# EAGLE board BRD (EAGLE 9.7.0)
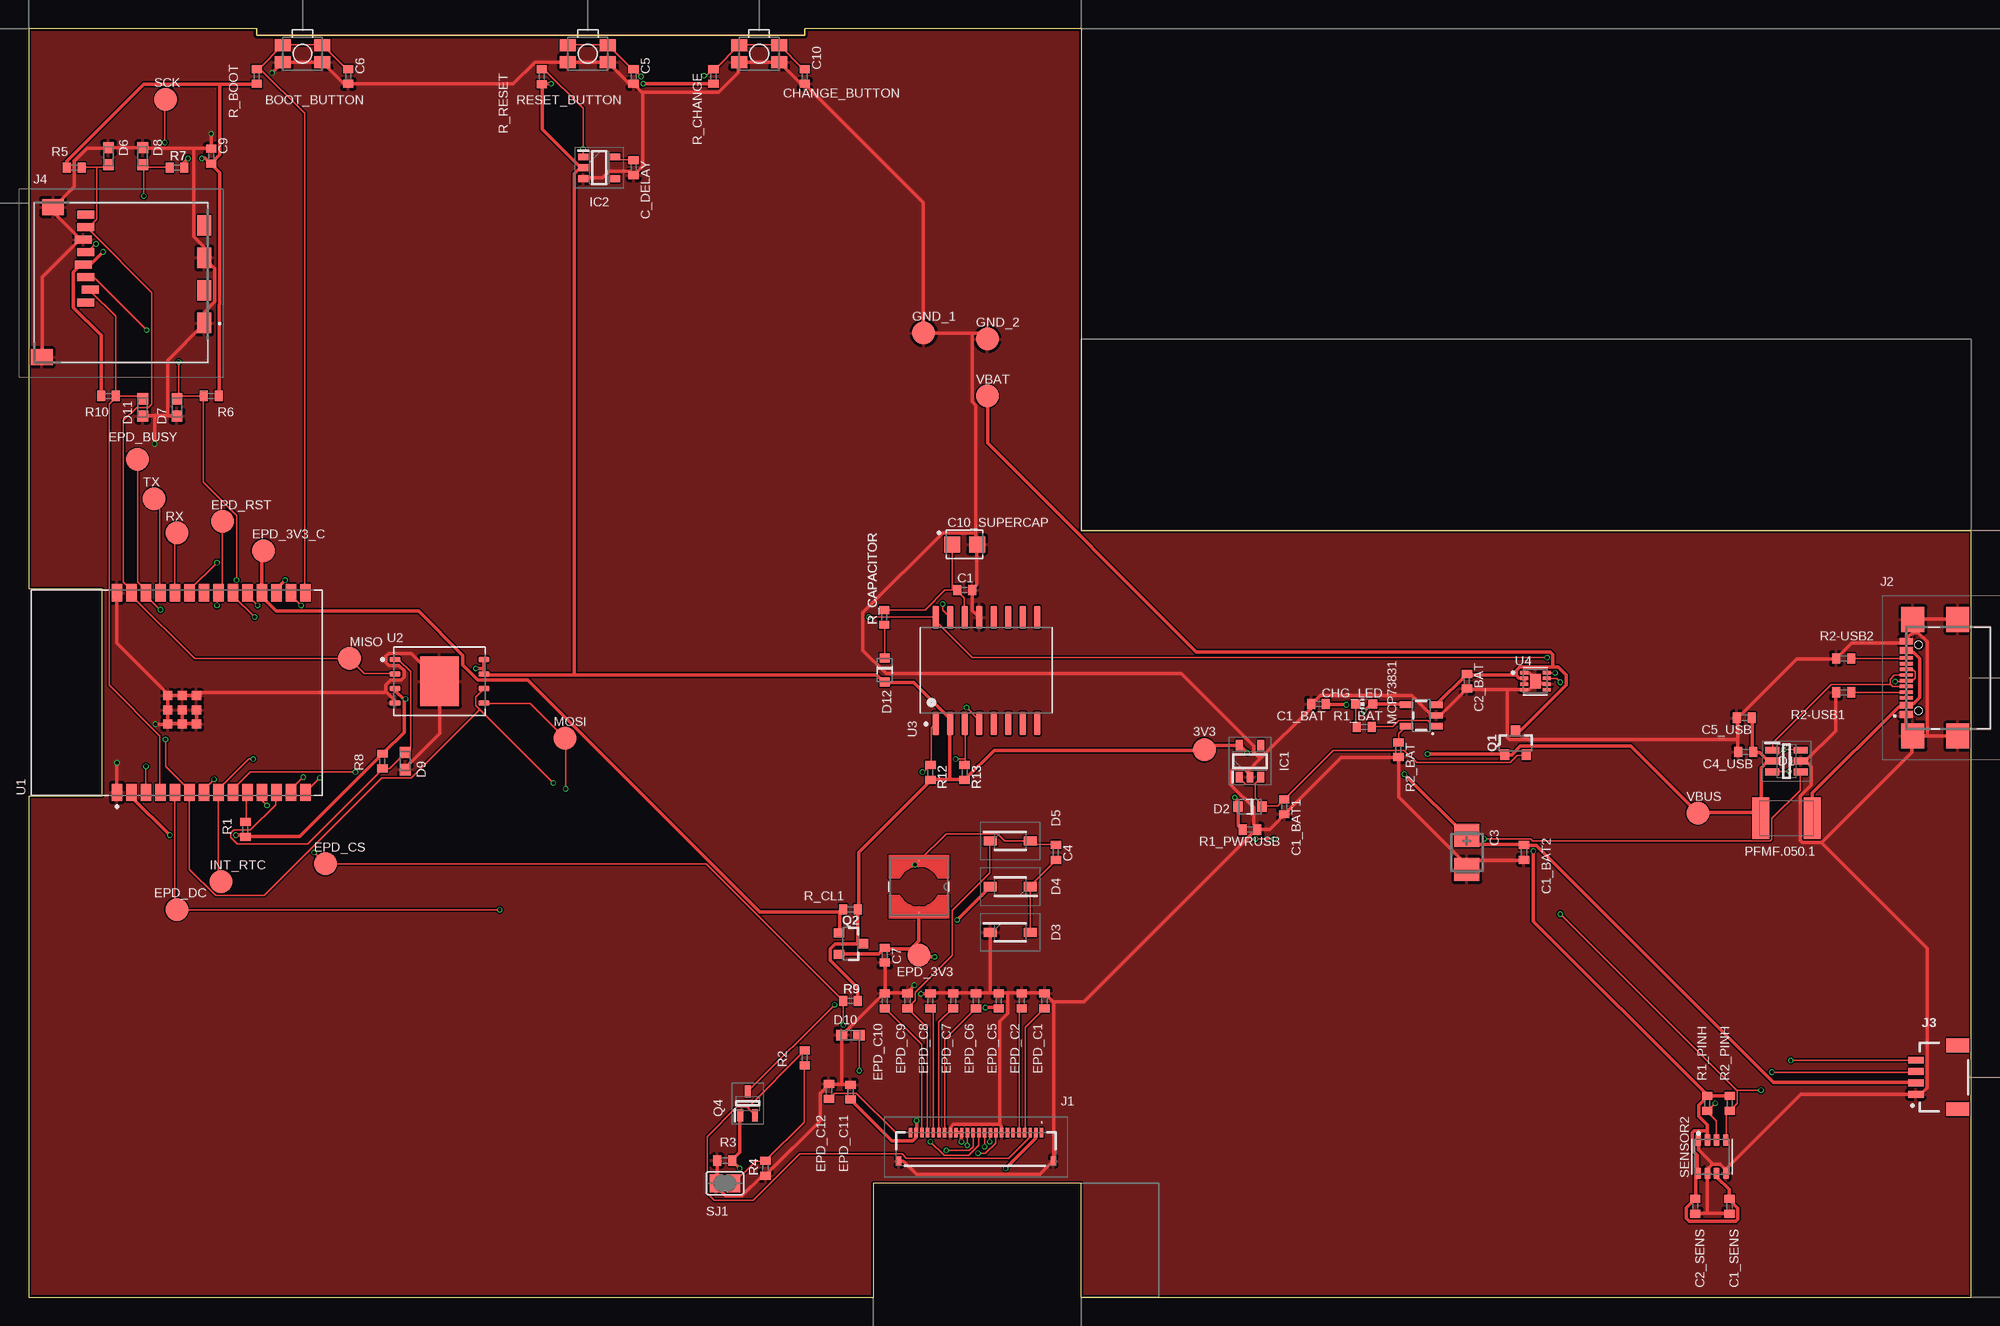
[diagram p0: board, top side]
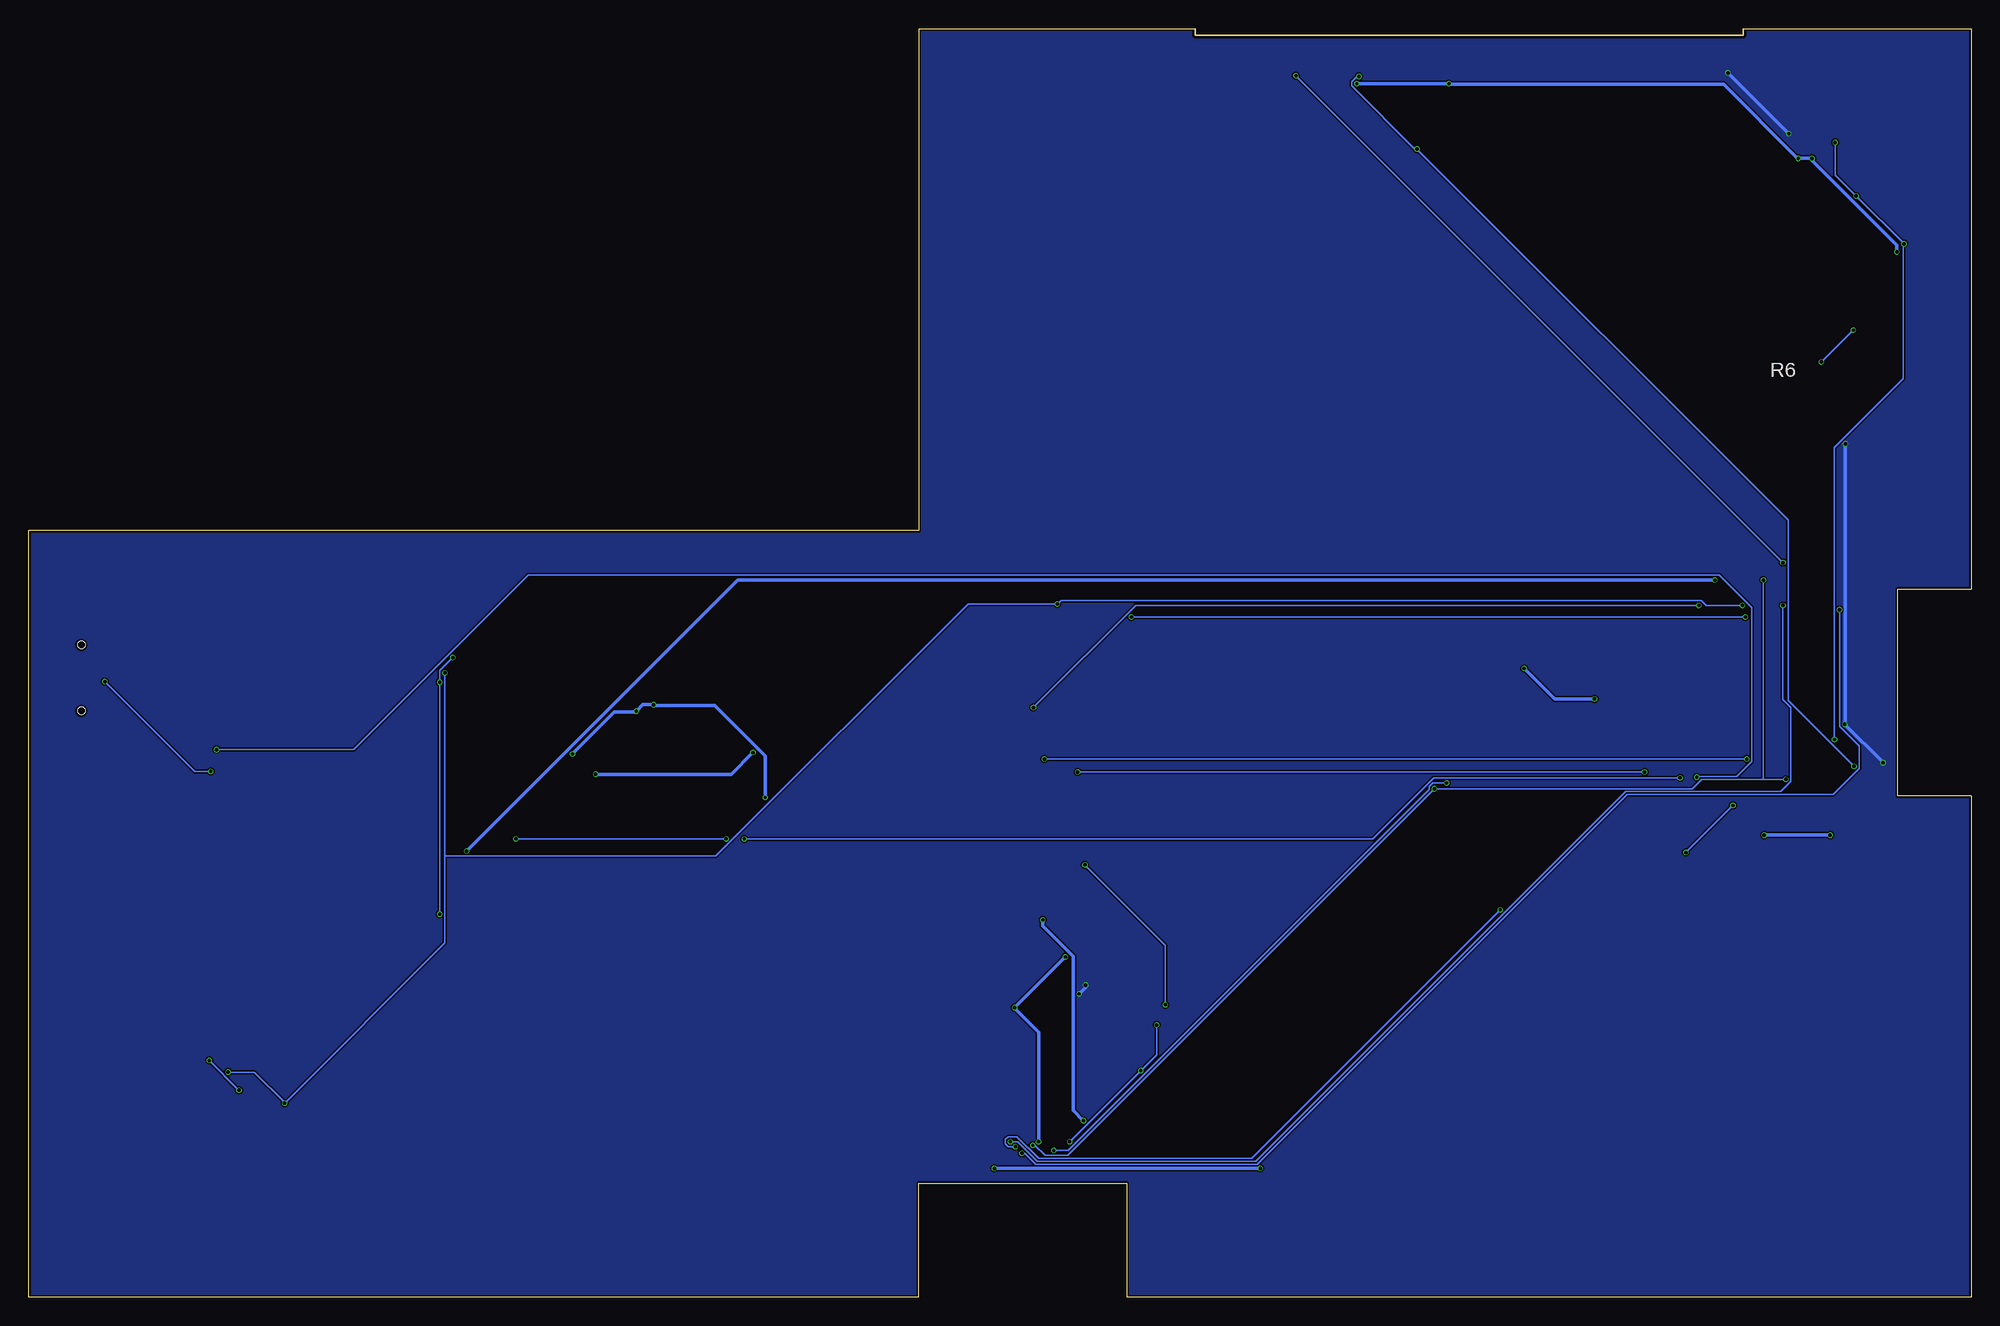
[diagram p1: board, bottom side, seen from below]

Size 170.2 x 111.2 mm. Coordinates in mm from the lower left corner, seen from the top.
Outline: 0,0 74,0 74,10 92.2,10 92.2,0 170.2,0 170.2,67.2 92.2,67.2 92.2,111.2 68.01,111.2 68.01,110.6 19.99,110.6 19.99,111.2 0,111.2 0,62.08 6.46,62.08 6.46,43.94 0,43.94 0,0
Copper layers (1*16): Top 0.035mm / dielectric 1.6mm / Bottom 0.035mm
Design rules "jlcpcb-2layers.dru": minimum track width 5mil, minimum drill 0.3mm, track to track 5mil, track to pad 5mil, pad to pad 5mil, via to via 5mil, smd to smd 5mil, copper to edge 0.2mm, drill to drill 6mil, minimum pad ring 10mil, minimum via ring 3mil, stop-mask expansion 4mil, vias tented up to drill 0mil, thermal gap 10mil
Net classes: 1 0.3mm: width 0.3 mm

## Footprints (pad centres in the part's own frame; a part is rotated, then mirrored left to right if it is on the bottom)
TP20R = smd 2 x 2: TP 0,0
MYBUTTON = smd 1.4 x 1.05: 1 1.75,0.75; 2 -1.75,0.75; 3 -1.75,-0.75; 4 1.75,-0.75
EAGLE-LTSPICE_C0402 = smd 0.7 x 0.9: 1 -0.65,0; 2 0.65,0
RCL_CT3528 = smd 2 x 2.2: + -1.5,0; - 1.5,0
CAPCP3225X100N = smd 1.4 x 1.4: 1 -1.1,0; 2 1.1,0
ADAFRUIT_CHIP-LED0603 = smd 0.8 x 0.8: A 0,-0.75; C 0,0.75
SOT95P280X145-6N = smd 1.2 x 0.6: 1 -1.25,0.95; 2 -1.25,0; 3 -1.25,-0.95; 4 1.25,-0.95; 5 1.25,0; 6 1.25,0.95
ESP32_WROVER_AVX---SD0805S020S1R0_AVX_SD0805S020S1R0_0 = smd 0.8 x 0.9: 1 -1.05,0; 2 1.05,0
SOD3716X135N = smd 1.15 x 0.8: 1 -1.75,0; 2 1.75,0
DIOC1608X36N = smd 0.97 x 0.94: 1 -0.75,0; 2 0.75,0
SOT95P280X120-5N = smd 0.9 x 0.6: 1 -1.4,0.95; 2 -1.4,0; 3 -1.4,-0.95; 4 1.4,-0.95; 5 1.4,0.95
SOT95P280X125-5N = smd 0.9 x 0.6: 1 -1.4,0.95; 2 -1.4,0; 3 -1.4,-0.95; 4 1.4,-0.95; 5 1.4,0.95
FH34SRJ24S05SH99 = smd 0.3 x 0.8: 1 5.75,1.45; 2 5.25,1.45; 3 4.75,1.45; 4 4.25,1.45; 5 3.75,1.45; 6 3.25,1.45; 7 2.75,1.45; 8 2.25,1.45; 9 1.75,1.45; 10 1.25,1.45; 11 0.75,1.45; 12 0.25,1.45; 13 -0.25,1.45; 14 -0.75,1.45; 15 -1.25,1.45; 16 -1.75,1.45; 17 -2.25,1.45; 18 -2.75,1.45; 19 -3.25,1.45; 20 -3.75,1.45; 21 -4.25,1.45; 22 -4.75,1.45; 23 -5.25,1.45; 24 -5.75,1.45 | smd 0.4 x 0.8: MP1 6.75,-1.05; MP2 -6.75,-1.05
SAMACSYS_PARTS_USB4110GFA = smd 0.3 x 1.15: A1 -3.35,3.678; A4 -2.55,3.678; A5 -1.25,3.678; A6 -0.25,3.678; A7 0.25,3.678; A8 1.25,3.678; A9 2.55,3.678; A12 3.35,3.678; B1 3.05,3.678; B4 2.25,3.678; B5 1.75,3.678; B6 0.75,3.678; B7 -0.75,3.678; B8 -1.75,3.678; B9 -2.25,3.678; B12 -3.05,3.678 | smd 2.18 x 2: MP1 -5.11,-0.827; MP2 5.11,-0.827; MP3 -5.11,3.103; MP4 5.11,3.103 | hole 0.65: -2.89,2.603; 2.89,2.603
JST04_1MM_RA = smd 0.6 x 1.35: 1 -1.5,0; 2 -0.5,0; 3 0.5,0; 4 1.5,0 | smd 1.2 x 2: NC1 2.8,-3.675; NC2 -2.8,-3.675
112ATAARR03ATTEND = smd 1.8 x 1.2: G1 10.6,10.4; G2 4.9,10.4; S1 7.75,10.4; S2 2.05,10.4 | smd 1.4 x 1.9: G3 13.6,-3.85; G4 0.45,-2.85 | smd 0.7 x 1.5: P1 8.8,0; P2 7.7,0.4; P3 6.6,0; P4 5.5,-0.2; P5 4.4,0; P6 3.3,-0.2; P7 2.2,0; P8 1.1,0
IND_4828-WE-TPC_WRE = smd 0.127 x 0.127: 1 -2.286,0; 2 2.286,0
ESP32_WROVER_SPARKFUN-IC-POWER_SOT23-5 = smd 0.55 x 1.2: 1 -0.95,-1.3; 2 0,-1.3; 3 0.95,-1.3; 4 0.95,1.3; 5 -0.95,1.3
ESP32C6_VARISTOR_CT/CN1812 = smd 1.5 x 3.6: 1 -2.25,0; 2 2.25,0
ESP32_WROVER_SPARKFUN-DISCRETESEMI_SOT23-3 = smd 0.8 x 0.9: 1 -0.95,-1; 2 0.95,-1; 3 0,1.1
SOT65P210X110-3N = smd 1.05 x 0.5: 1 -1.05,0.65; 2 -1.05,-0.65; 3 1.05,0
ESP32_WROVER_EAGLE-LTSPICE_R0402 = smd 0.7 x 0.9: 1 -0.65,0; 2 0.65,0
ESP32_WROVER_BME680_PSON80P300X300X100-8N = smd 1.016 x 0.5: 1 1.458,1.2; 2 1.458,0.4; 3 1.458,-0.4; 4 1.458,-1.2; 5 -1.458,-1.22; 6 -1.458,-0.4; 7 -1.458,0.4; 8 -1.458,1.2
SJ = smd 1.168 x 1.6: 1 -0.762,0; 2 0.762,0
XCVR_ESP32-C6-WROOM-1-N8 = smd 1.5 x 0.9: 1 -8.75,5.26; 2 -8.75,3.99; 3 -8.75,2.72; 4 -8.75,1.45; 5 -8.75,0.18; 6 -8.75,-1.09; 7 -8.75,-2.36; 8 -8.75,-3.63; 9 -8.75,-4.9; 10 -8.75,-6.17; 11 -8.75,-7.44; 12 -8.75,-8.71; 13 -8.75,-9.98; 14 -8.75,-11.25; 15 8.75,-11.25; 16 8.75,-9.98; 17 8.75,-8.71; 18 8.75,-7.44; 19 8.75,-6.17; 20 8.75,-4.9; 21 8.75,-3.63; 22 8.75,-2.36; 23 8.75,-1.09; 24 8.75,0.18; 25 8.75,1.45; 26 8.75,2.72; 27 8.75,3.99; 28 8.75,5.26 | smd 0.8 x 0.8: 29_1 -2.755,0.79; 29_2 -1.505,0.79; 29_3 -0.255,0.79; 29_4 -2.755,-0.46; 29_5 -1.505,-0.46; 29_6 -0.255,-0.46; 29_7 -2.755,-1.71; 29_8 -1.505,-1.71; 29_9 -0.255,-1.71
SON127P600X800X80-9N = smd 0.94 x 0.44: 1 -3.895,1.905; 2 -3.895,0.635; 3 -3.895,-0.635; 4 -3.895,-1.905; 5 3.895,-1.905; 6 3.895,-0.635; 7 3.895,0.635; 8 3.895,1.905 | smd 3.4 x 4.3: 9 0,0
SOIC127P1032X265-16N = smd 2.05 x 0.59: 1 -4.655,4.445; 2 -4.655,3.175; 3 -4.655,1.905; 4 -4.655,0.635; 5 -4.655,-0.635; 6 -4.655,-1.905; 7 -4.655,-3.175; 8 -4.655,-4.445; 9 4.655,-4.445; 10 4.655,-3.175; 11 4.655,-1.905; 12 4.655,-0.635; 13 4.655,0.635; 14 4.655,1.905; 15 4.655,3.175; 16 4.655,4.445
SON50P200X200X80-9N = smd 0.76 x 0.305: 1 -0.985,0.75; 2 -0.985,0.25; 3 -0.985,-0.25; 4 -0.985,-0.75 | smd 0.76 x 0.27: 5 0.985,-0.75; 6 0.985,-0.25; 7 0.985,0.25; 8 0.985,0.75 | smd 0.9 x 1.3: 9 0,0

## Placement (x,y rotation side)
3V3  TPTP20R  [TP20R]  103,48 90 top
BOOT_BUTTON  BUTTON_CUSYOMV1  [MYBUTTON]  24,109 180 top
C1  100nF  [EAGLE-LTSPICE_C0402]  82,62 0 top
C1_BAT  4.7uF  [EAGLE-LTSPICE_C0402]  113,52 180 top
C1_BAT1  4.7uF  [EAGLE-LTSPICE_C0402]  110,43 270 top
C1_BAT2  4.7uF  [EAGLE-LTSPICE_C0402]  131,39 90 top
C1_SENS  100nF  [EAGLE-LTSPICE_C0402]  149,8 270 top
C2_BAT  4.7uF  [EAGLE-LTSPICE_C0402]  126,54 270 top
C2_SENS  100nF  [EAGLE-LTSPICE_C0402]  146,8 270 top
C3  100uF TANT  [RCL_CT3528]  126,39 270 top
C4  4.7uF/25V  [EAGLE-LTSPICE_C0402]  90,39 90 top
C4_USB  100nF  [EAGLE-LTSPICE_C0402]  150.42,47.8 180 top
C5  1uF  [EAGLE-LTSPICE_C0402]  53,107 270 top
C5_USB  4.7uF  [EAGLE-LTSPICE_C0402]  150.31,50.8 180 top
C6  100nF  [EAGLE-LTSPICE_C0402]  28,107 270 top
C7  10uF  [EAGLE-LTSPICE_C0402]  75,30 270 top
C9  100nF  [EAGLE-LTSPICE_C0402]  16,100 90 top
C10  100nF  [EAGLE-LTSPICE_C0402]  68,107 270 top
C10_SUPERCAP  CPH3225A  [CAPCP3225X100N]  82,66 0 top
C_DELAY  100nF  [EAGLE-LTSPICE_C0402]  53,99 270 top
CHANGE_BUTTON  BUTTON_CUSYOMV1  [MYBUTTON]  64,109 180 top
CHG_LED  LG R971  [ADAFRUIT_CHIP-LED0603]  117,52 90 top
D1  USBLC6-2SC6Y  [SOT95P280X145-6N]  154,47 0 top
D2  ESP32_WROVER_AVX---SD0805S020S1R0_AVX_SD0805S020S1R0_0_0AVX_SD0805S020S1R0_0_0  [ESP32_WROVER_AVX---SD0805S020S1R0_AVX_SD0805S020S1R0_0]  107,43 180 top
D3  MBR0530  [SOD3716X135N]  86,32 0 top
D4  MBR0530  [SOD3716X135N]  86,36 180 top
D5  MBR0530  [SOD3716X135N]  86,40 0 top
D6  PGB1010603MR  [DIOC1608X36N]  7,100 270 top
D7  PGB1010603MR  [DIOC1608X36N]  13,78 90 top
D8  PGB1010603MR  [DIOC1608X36N]  10,100 270 top
D9  PGB1010603MR  [DIOC1608X36N]  33,47 90 top
D10  PGB1010603MR  [DIOC1608X36N]  72,23 0 top
D11  PGB1010603MR  [DIOC1608X36N]  10,78 90 top
D12  ESP32_WROVER_AVX---SD0805S020S1R0_AVX_SD0805S020S1R0_0_0AVX_SD0805S020S1R0_0_0  [ESP32_WROVER_AVX---SD0805S020S1R0_AVX_SD0805S020S1R0_0]  75,55 270 top
EPD_3V3  TPTP20R  [TP20R]  78,30 180 top
EPD_3V3_C  TPTP20R  [TP20R]  20.58,65.44 0 top
EPD_BUSY  TPTP20R  [TP20R]  9.53,73.44 0 top
EPD_C1  1uF/50V  [EAGLE-LTSPICE_C0402]  89,26 270 top
EPD_C2  1uF/50V  [EAGLE-LTSPICE_C0402]  87,26 270 top
EPD_C5  0.1uF/50V  [EAGLE-LTSPICE_C0402]  85,26 270 top
EPD_C6  1uF/50V  [EAGLE-LTSPICE_C0402]  83,26 270 top
EPD_C7  1uF/50V  [EAGLE-LTSPICE_C0402]  81,26 270 top
EPD_C8  1uF/50V  [EAGLE-LTSPICE_C0402]  79,26 270 top
EPD_C9  1uF/50V  [EAGLE-LTSPICE_C0402]  77,26 270 top
EPD_C10  1uF/50V  [EAGLE-LTSPICE_C0402]  75,26 270 top
EPD_C11  1uF/50V  [EAGLE-LTSPICE_C0402]  72,18 270 top
EPD_C12  1uF/50V  [EAGLE-LTSPICE_C0402]  70.12,18.07 270 top
EPD_CS  TPTP20R  [TP20R]  26,38 0 top
EPD_DC  TPTP20R  [TP20R]  13,34 0 top
EPD_RST  TPTP20R  [TP20R]  17,68 0 top
GND_1  TPTP20R  [TP20R]  78.41,84.52 0 top
GND_2  TPTP20R  [TP20R]  84,84 0 top
IC1  XC6220A331MR-G  [SOT95P280X120-5N]  107,47 90 top
IC2  BD5229G-TR  [SOT95P280X125-5N]  50,99 0 top
INT_RTC  TPTP20R  [TP20R]  16.88,36.44 0 top
J1  FH34SRJ-24S-0.5SH_99_  [FH34SRJ24S05SH99]  83,13 0 top
J2  SAMACSYS_PARTS_USB4110-GF-A  [SAMACSYS_PARTS_USB4110GFA]  168.17,54.3 90 top
J3  QWIIC_RIGHT_ANGLE  [JST04_1MM_RA]  165.32,19.3 90 top
J4  112A-TAAR-R03_ATTEND  [112ATAARR03ATTEND]  5,96 270 top
L1  68uH  [IND_4828-WE-TPC_WRE]  78,36 270 top
MCP73831  ESP32_WROVER_SPARKFUN-IC-POWER_MCP73831  [ESP32_WROVER_SPARKFUN-IC-POWER_SOT23-5]  122,51 90 top
MISO  TPTP20R  [TP20R]  28.13,56 0 top
MOSI  TPTP20R  [TP20R]  47,49 0 top
PFMF.050.1  ESP32C6_VARISTORCN1812  [ESP32C6_VARISTOR_CT/CN1812]  154,42 180 top
Q1  20V/4.2A/52mΩ/1.4W  [ESP32_WROVER_SPARKFUN-DISCRETESEMI_SOT23-3]  130.26,48.56 0 top
Q2  20V/4.2A/52mΩ/1.4W  [ESP32_WROVER_SPARKFUN-DISCRETESEMI_SOT23-3]  72,31 270 top
Q4  SI1308EDL-T1-GE3  [SOT65P210X110-3N]  63,17 90 top
R1  10K  [ESP32_WROVER_EAGLE-LTSPICE_R0402]  19,41 270 top
R1_BAT  200  [ESP32_WROVER_EAGLE-LTSPICE_R0402]  117,50 180 top
R1_PINH  10K  [ESP32_WROVER_EAGLE-LTSPICE_R0402]  147.05,17 90 top
R1_PWRUSB  100K  [ESP32_WROVER_EAGLE-LTSPICE_R0402]  107,41 180 top
R2  0.47  [ESP32_WROVER_EAGLE-LTSPICE_R0402]  68,21 270 top
R2-USB1  5k1  [ESP32_WROVER_EAGLE-LTSPICE_R0402]  159,53.03 0 top
R2-USB2  5k1  [ESP32_WROVER_EAGLE-LTSPICE_R0402]  159,56 180 top
R2_BAT  2K  [ESP32_WROVER_EAGLE-LTSPICE_R0402]  120,48 270 top
R2_PINH  10K  [ESP32_WROVER_EAGLE-LTSPICE_R0402]  149.03,17 90 top
R3  10K  [ESP32_WROVER_EAGLE-LTSPICE_R0402]  61,12 180 top
R4  2.2  [ESP32_WROVER_EAGLE-LTSPICE_R0402]  64.56,11.33 90 top
R5  10K  [ESP32_WROVER_EAGLE-LTSPICE_R0402]  4,99 180 top
R6  10K  [ESP32_WROVER_EAGLE-LTSPICE_R0402]  16,79 0 top
R7  10K  [ESP32_WROVER_EAGLE-LTSPICE_R0402]  13,99 0 top
R8  10K  [ESP32_WROVER_EAGLE-LTSPICE_R0402]  31,47 90 top
R9  10K  [ESP32_WROVER_EAGLE-LTSPICE_R0402]  72,26 0 top
R10  10K  [ESP32_WROVER_EAGLE-LTSPICE_R0402]  7,79 180 top
R12  10K  [ESP32_WROVER_EAGLE-LTSPICE_R0402]  79,46 270 top
R13  10K  [ESP32_WROVER_EAGLE-LTSPICE_R0402]  82,46 270 top
R_BOOT  10K  [ESP32_WROVER_EAGLE-LTSPICE_R0402]  20,107 90 top
R_CAPACITOR  15  [ESP32_WROVER_EAGLE-LTSPICE_R0402]  74.96,59.6 90 top
R_CHANGE  10K  [ESP32_WROVER_EAGLE-LTSPICE_R0402]  60,107 90 top
R_CL1  10K  [ESP32_WROVER_EAGLE-LTSPICE_R0402]  72,34 180 top
R_RESET  10K  [ESP32_WROVER_EAGLE-LTSPICE_R0402]  44.96,106.99 90 top
RESET_BUTTON  BUTTON_CUSYOMV1  [MYBUTTON]  49,109 180 top
RX  TPTP20R  [TP20R]  13,67 0 top
SCK  TPTP20R  [TP20R]  12,105 0 top
SENSOR2  BME688  [ESP32_WROVER_BME680_PSON80P300X300X100-8N]  147.47,12.34 90 top
SJ1  [SJ]  61,10 0 top
TX  TPTP20R  [TP20R]  11,70 0 top
U1  ESP32-C6-WROOM-1-N8  [XCVR_ESP32-C6-WROOM-1-N8]  13,53 90 top
U2  W25Q512JVEIQ  [SON127P600X800X80-9N]  36,54 0 top
U3  DS3231SN#  [SOIC127P1032X265-16N]  83.9,54.95 90 top
U4  MAX17048G+T10  [SON50P200X200X80-9N]  132,54 0 top
VBAT  TPTP20R  [TP20R]  84,79 0 top
VBUS  TPTP20R  [TP20R]  146.23,42.44 0 top

## Library data of the parts
3V3 BOOT_BUTTON CHANGE_BUTTON CHG_LED EPD_3V3 EPD_3V3_C EPD_BUSY EPD_CS EPD_DC EPD_RST GND_1 GND_2 INT_RTC MISO MOSI PFMF.050.1 RESET_BUTTON RX SCK SJ1 TX VBAT VBUS = DeskAssistant v19 v1
C1 C1_BAT C1_BAT1 C1_BAT2 C1_SENS C2_BAT C2_SENS C4 C4_USB C5 C5_USB C6 C7 C9 C10 C_DELAY EPD_C1 EPD_C2 EPD_C5-EPD_C12 = DeskAssistant v19 v1; SPICEMODEL: NONE; SPICEPREFIX: C
C3 = DeskAssistant v19 v1; SPICEPREFIX: C
C10_SUPERCAP = DeskAssistant v19 v1; AVAILABILITY: Not in stock; CHECK_PRICES: https://www.snapeda.com/parts/CPH3225A/Seiko+Instruments/view-part/?ref=eda; DESCRIPTION: 11 mF (EDLC) Supercapacitor 3.3 V 1210 (3225 Metric) - -; MF: Seiko Instruments; MP: CPH3225A; PACKAGE: 1210 Seiko; PRICE: None; PURCHASE-URL: https://www.snapeda.com/api/url_track_click_mouser/?unipart_id=562593&manufacturer=Seiko Instruments&part_name=CPH3225A&search_term=None; SNAPEDA_LINK: https://www.snapeda.com/parts/CPH3225A/Seiko+Instruments/view-part/?ref=snap
D1 = DeskAssistant v19 v1; AVAILABILITY: In Stock; CHECK_PRICES: https://www.snapeda.com/parts/USBLC6-2SC6Y/STMicroelectronics/view-part/?ref=eda; DESCRIPTION: 17V Clamp 5A (8/20µs) Ipp Tvs Diode Surface Mount SOT-23-6; MF: STMicroelectronics; MP: USBLC6-2SC6Y; PACKAGE: SOT-23-6 STMicroelectronics; PRICE: None; SNAPEDA_LINK: https://www.snapeda.com/parts/USBLC6-2SC6Y/STMicroelectronics/view-part/?ref=snap
D2 D12 = DeskAssistant v19 v1; CENTROID_NOT_SPECIFIED: No; DATASHEET: http://datasheets.avx.com/schottky.pdf; DIGIKEY_DESCRIPTION: DIODE SCHOTTKY 20V 1A 0805; DIGIKEY_PART_NUMBER: 478-7800-1-ND; LEAD_FREE: yes; MF: AVX; MOUSER_PART_NUMBER: 581-SD0805S020S1R0; PACKAGE: 0805 (2012 metric); PREFIX: D; ROHS: yes; TEMPERATURE_RANGE_HIGH: +125°C; TEMPERATURE_RANGE_LOW: -55°C
D3-D5 = DeskAssistant v19 v1; AVAILABILITY: In Stock; CHECK_PRICES: https://www.snapeda.com/parts/MBR0530/Onsemi/view-part/?ref=eda; DESCRIPTION: Diode Schottky 30 V 500mA Surface Mount SOD-123; MF: ON Semiconductor; MP: MBR0530; PACKAGE: SOD-123-2 ON Semiconductor; PRICE: None; PURCHASE-URL: https://www.snapeda.com/api/url_track_click_mouser/?unipart_id=179458&manufacturer=ON Semiconductor&part_name=MBR0530&search_term=None; SNAPEDA_LINK: https://www.snapeda.com/parts/MBR0530/Onsemi/view-part/?ref=snap
D6-D11 = DeskAssistant v19 v1; AVAILABILITY: In Stock; CHECK_PRICES: https://www.snapeda.com/parts/PGB1010603MR/Littelfuse/view-part/?ref=eda; DESCRIPTION: 150V (Typ) Clamp - Ipp Tvs Diode Surface Mount 0603 (1608 Metric); MF: Littelfuse Inc.; MP: PGB1010603MR; PACKAGE: 0603 Littelfuse Inc.; PRICE: None; PURCHASE-URL: https://www.snapeda.com/api/url_track_click_mouser/?unipart_id=5659453&manufacturer=Littelfuse Inc.&part_name=PGB1010603MR&search_term=None; SNAPEDA_LINK: https://www.snapeda.com/parts/PGB1010603MR/Littelfuse/view-part/?ref=snap
IC1 = DeskAssistant v19 v1; DESCRIPTION: LDO Voltage Regulators; HEIGHT: 1.2mm; MANUFACTURER_NAME: Torex; MANUFACTURER_PART_NUMBER: XC6220A331MR-G; MOUSER_PART_NUMBER: 865-XC6220A331MR-G; MOUSER_PRICE-STOCK: https://www.mouser.co.uk/ProductDetail/Torex-Semiconductor/XC6220A331MR-G?qs=AsjdqWjXhJ8ZSWznL1J0gg%3D%3D
IC2 = DeskAssistant v19 v1; DESCRIPTION: Voltage Detector with Adjustable Delay Time: CMOS processes are utilized to develop high precision, low current consumption CMOS reset ICs that allow arbitrary setting of the delay time. The extensive lineup includes both Nch Open Drain and CMOS output types in a wide range of detection voltages (from 2.3V to 6.0V, in 0.1V steps), enabling selection of the ideal solution based on customer requirements. In addition, the entire series is of course both lead-free and RoHS-compliant.; HEIGHT: 1.25mm; MANUFACTURER_NAME: ROHM Semiconductor; MANUFACTURER_PART_NUMBER: BD5229G-TR; MOUSER_PART_NUMBER: 755-BD5229G-TR; MOUSER_PRICE-STOCK: https://www.mouser.co.uk/ProductDetail/ROHM-Semiconductor/BD5229G-TR?qs=4kLU8WoGk0vvnhrrYwdszw%3D%3D
J1 = DeskAssistant v19 v1; DESCRIPTION: 24 Position FFC, FPC Connector Contacts, Top and Bottom 0.020" (0.50mm) Surface Mount, Right Angle; HEIGHT: 1.1mm; MANUFACTURER_NAME: Hirose; MANUFACTURER_PART_NUMBER: FH34SRJ-24S-0.5SH(99); MOUSER_PART_NUMBER: 798-FH34SRJ24S05SH99; MOUSER_PRICE-STOCK: https://www.mouser.co.uk/ProductDetail/Hirose-Connector/FH34SRJ-24S-0.5SH99?qs=vcbW%252B4%252BSTIpKBl5ap9J8Fw%3D%3D
J2 = DeskAssistant v19 v1; DESCRIPTION: CONN USB 2.0 TYPE-C R/A SMT; HEIGHT: 3.26mm; MANUFACTURER_NAME: GCT (GLOBAL CONNECTOR TECHNOLOGY); MANUFACTURER_PART_NUMBER: USB4110-GF-A; MOUSER_PART_NUMBER: 640-USB4110-GF-A; MOUSER_PRICE-STOCK: https://www.mouser.co.uk/ProductDetail/GCT/USB4110-GF-A?qs=KUoIvG%2F9IlYiZvIXQjyJeA%3D%3D
J3 = DeskAssistant v19 v1; PROD_ID: CONN-13694
J4 = DeskAssistant v19 v1; DESCRIPTION: Micro SD Card Socket, Push-Push Type, Top Mount, SMT, H=1.83mm, 10u; HEIGHT: 1.9mm; MANUFACTURER_NAME: ATTEND; MANUFACTURER_PART_NUMBER: 112A-TAAR-R03 ATTEND
L1 = DeskAssistant v19 v1; COPYRIGHT: Copyright (C) 2024 Ultra Librarian. All rights reserved.; MANUFACTURER_PART_NUMBER: 744043680; MFR_NAME: Wurth Electronics
MCP73831 = DeskAssistant v19 v1; PROD_ID: IC-09995
Q1 Q2 = DeskAssistant v19 v1; PROD_ID: DMG2305UX-7
Q4 = DeskAssistant v19 v1; AVAILABILITY: In Stock; CHECK_PRICES: https://www.snapeda.com/parts/SI1308EDL-T1-GE3/Vishay+Siliconix/view-part/?ref=eda; DESCRIPTION: Si1308EDL-T1-GE3 N-channel MOSFET Transistor, 1.5 A, 30 V, 3-Pin SC-70 | Siliconix / Vishay SI1308EDL-T1-GE3; MF: Vishay Siliconix; MP: SI1308EDL-T1-GE3; PACKAGE: SOT-323 Vishay Semiconductor; PRICE: None; PURCHASE-URL: https://www.snapeda.com/api/url_track_click_mouser/?unipart_id=274603&manufacturer=Vishay Siliconix&part_name=SI1308EDL-T1-GE3&search_term=None; SNAPEDA_LINK: https://www.snapeda.com/parts/SI1308EDL-T1-GE3/Vishay+Siliconix/view-part/?ref=snap
R1 R1_BAT R1_PINH R1_PWRUSB R2 R2-USB1 R2-USB2 R2_BAT R2_PINH R3-R10 R12 R13 R_BOOT R_CAPACITOR R_CHANGE R_CL1 R_RESET = DeskAssistant v19 v1; SPICEMODEL: NONE; SPICEPREFIX: R
SENSOR2 = DeskAssistant v19 v1; AVAILABILITY: Unavailable; DESCRIPTION: Integrated Environmental Unit; MF: Bosch Sensortec; MP: BME680; PACKAGE: LGA-8 Bosch Tools; PRICE: None
U1 = DeskAssistant v19 v1; AVAILABILITY: In Stock; CHECK_PRICES: https://www.snapeda.com/parts/ESP32-C6-WROOM-1-N8/Espressif+Systems/view-part/?ref=eda; DESCRIPTION: Multiprotocol Modules ESP32-C6 module, Wi-Fi 6 in 2.4 GHz band, Bluetooth 5, Zigbee 3.0 and Thread. ESP34-WROOM Compatible - ENGINEERING SAMPLE; MF: Espressif Systems; MP: ESP32-C6-WROOM-1-N8; PACKAGE: None; PRICE: None; SNAPEDA_LINK: https://www.snapeda.com/parts/ESP32-C6-WROOM-1-N8/Espressif+Systems/view-part/?ref=snap
U2 = DeskAssistant v19 v1; AVAILABILITY: In Stock; CHECK_PRICES: https://www.snapeda.com/parts/W25Q512JVEIQ/Winbond+Electronics/view-part/?ref=eda; DESCRIPTION: FLASH - NOR Memory IC 512Mb (64M x 8) SPI - Quad I/O 133 MHz 8-WSON (8x6); MF: Winbond Electronics; MP: W25Q512JVEIQ; PACKAGE: Package; PRICE: None; SNAPEDA_LINK: https://www.snapeda.com/parts/W25Q512JVEIQ/Winbond+Electronics/view-part/?ref=snap
U3 = DeskAssistant v19 v1; AVAILABILITY: In Stock; CHECK_PRICES: https://www.snapeda.com/parts/DS3231SN%23/Analog+Devices/view-part/?ref=eda; DESCRIPTION: Extremely Accurate I²C-Integrated RTC/TCXO/Crystal; MF: Analog Devices; MP: DS3231SN#; PACKAGE: SOIC-16 Maxim; PRICE: None; PURCHASE-URL: https://www.snapeda.com/api/url_track_click_mouser/?unipart_id=99048&manufacturer=Analog Devices&part_name=DS3231SN#&search_term=None; SNAPEDA_LINK: https://www.snapeda.com/parts/DS3231SN%23/Analog+Devices/view-part/?ref=snap
U4 = DeskAssistant v19 v1; AVAILABILITY: In Stock; CHECK_PRICES: https://www.snapeda.com/parts/MAX17048G+T10/Analog+Devices/view-part/?ref=eda; DESCRIPTION: 3µA 1-Cell/2-Cell Fuel Gauge with ModelGauge; MF: Analog Devices; MP: MAX17048G+T10; PACKAGE: TDFN-8 Maxim; PRICE: None; PURCHASE-URL: https://www.snapeda.com/api/url_track_click_mouser/?unipart_id=329239&manufacturer=Analog Devices&part_name=MAX17048G+T10&search_term=None; SNAPEDA_LINK: https://www.snapeda.com/parts/MAX17048G+T10/Analog+Devices/view-part/?ref=snap

## Nets
3V3 [0.3mm]: 3V3.TP C1_BAT2.2 C3.+ C9.1 D12.2 IC1.5 IC2.2 J3.2 J4.P4 Q2.3 R1.2 R5.2 R6.2 R7.2 R8.2 R9.2 R10.2 R12.2 R13.2 R_BOOT.1 R_CHANGE.1 R_CL1.1 R_RESET.1 U1.2 U2.3 U2.7 U2.8 U3.2
12C_PW [0.3mm]: C1_SENS.1 C2_SENS.1 R1_PINH.2 R2_PINH.2 SENSOR2.2 SENSOR2.6 SENSOR2.8 U1.17
32KHZ: R12.1 U1.9 U3.1
DN: D1.1 J2.A7 J2.B7
DP: D1.3 J2.A6 J2.B6
EPD_3V3 [0.3mm]: C7.1 EPD_3V3.TP EPD_C5.2 J1.15 J1.16 L1.2 Q2.2
EPD_3V3_C [0.3mm]: EPD_3V3_C.TP Q2.1 R_CL1.2 U1.18
EPD_BUSY: EPD_BUSY.TP J1.9 U1.26
EPD_CS: D10.2 EPD_CS.TP J1.12 R9.1 U1.11
EPD_DC: EPD_DC.TP J1.11 U1.5
EPD_RST: EPD_RST.TP J1.10 U1.21
FLASH_CS: D9.2 R8.1 U1.12 U2.1
GDR [0.3mm]: J1.2 Q4.1 R3.1
GND [0.3mm]: BOOT_BUTTON.1 BOOT_BUTTON.2 C1.2 C1_BAT1.2 C1_BAT2.1 C1_BAT.2 C1_SENS.2 C2_BAT.2 C2_SENS.2 C3.- C4_USB.2 C5.2 C5_USB.2 C6.2 C7.2 C9.2 C10.2 C10_SUPERCAP.2 C_DELAY.2 CHANGE_BUTTON.1 CHANGE_BUTTON.2 D1.5 D3.1 D6.1 D7.1 D8.1 D9.1 D10.1 D11.1 EPD_C1.1 EPD_C2.1 EPD_C5.1 EPD_C6.1 EPD_C7.1 EPD_C8.1 EPD_C9.1 EPD_C10.1 EPD_C11.1 EPD_C12.1 GND_1.TP GND_2.TP IC1.2 IC2.3 J1.8 J1.17 J1.MP1 J1.MP2 J2.A1 J2.A12 J2.B1 J2.B12 J2.MP1 J2.MP2 J2.MP3 J2.MP4 J3.1 J4.G1 J4.G2 J4.G3 J4.G4 J4.P6 MCP73831.2 R1_PWRUSB.1 R2-USB1.1 R2-USB2.2 R2_BAT.2 R3.2 R4.1 RESET_BUTTON.1 RESET_BUTTON.2 SENSOR2.1 SENSOR2.5 SENSOR2.7 SJ1.1 U1.1 U1.28 U1.29_1 U1.29_2 U1.29_3 U1.29_4 U1.29_5 U1.29_6 U1.29_7 U1.29_8 U1.29_9 U2.4 U2.9 U3.13 U4.1 U4.4 U4.6 U4.9
GND1: J2.B5 R2-USB2.1
GPIO8: R1.1 U1.10
INT_RTC: INT_RTC.TP R13.1 U1.8 U3.3
IO/BOOT: BOOT_BUTTON.3 BOOT_BUTTON.4 C6.1 R_BOOT.2 U1.15
IO/CHANGE: C10.1 CHANGE_BUTTON.3 CHANGE_BUTTON.4 R_CHANGE.2 U1.23
MISO: D6.2 J4.P7 MISO.TP R5.1 U1.27 U2.2
MOSI: D7.2 J1.14 J4.P3 MOSI.TP R6.1 U1.7 U2.5
N$1: J2.A5 R2-USB1.2
N$2: EPD_C7.2 J1.19
N$3: MCP73831.1 R1_BAT.1
N$4: C1_BAT1.1 D2.1 IC1.1 IC1.3 Q1.2
N$5: CHG_LED.C R1_BAT.2
N$6: EPD_C6.2 J1.18
N$7: MCP73831.5 R2_BAT.1
N$8: C4.1 D3.2 D4.1
N$10: EPD_C8.2 J1.20
N$11: EPD_C10.2 J1.22
N$13: EPD_C12.2 J1.24
N$17: C_DELAY.1 IC2.5
N$22: EPD_C2.2 J1.5
N$23: EPD_C1.2 J1.4
N$26: D12.1 R_CAPACITOR.1
PREVGH: D5.1 EPD_C9.2 J1.21
PREVGL [0.3mm]: D4.2 EPD_C11.2 J1.23
RESE: J1.3 Q4.2 R2.1
RESE': R2.2 R4.2 SJ1.2
RESET: C5.1 IC2.1 R_RESET.2 RESET_BUTTON.3 RESET_BUTTON.4 U1.3
RTC_RST: U1.16 U3.4
RX: RX.TP U1.24
SCK: D8.2 J1.13 J4.P5 R7.1 SCK.TP U1.6 U2.6
SCL: J3.4 R2_PINH.1 SENSOR2.4 U1.20 U3.16 U4.7
SDA: J3.3 R1_PINH.1 SENSOR2.3 U1.19 U3.15 U4.8
SRC: C4.2 D5.2 L1.1 Q4.3
SS_SD: D11.2 J4.P2 R10.1 U1.4
TX: TX.TP U1.25
USB_D+: D1.4 U1.14
USB_D-: D1.6 U1.13
VBAT [0.3mm]: C2_BAT.1 MCP73831.3 Q1.3 U4.2 U4.3 VBAT.TP
VBUS [0.3mm]: C1_BAT.1 C4_USB.1 C5_USB.1 CHG_LED.A D1.2 D2.2 MCP73831.4 PFMF.050.1.2 Q1.1 R1_PWRUSB.2 VBUS.TP
VRTC: C1.1 C10_SUPERCAP.1 R_CAPACITOR.2 U3.14
VUSB [0.3mm]: J2.A4 J2.A9 J2.B4 J2.B9 PFMF.050.1.1

## Tracks (layer width: path | path; a pad name or v marks a point on that pad's centre or on a via)
3V3  (via drill 0.3)
  Top 0.3: 16.76,106.3 19.94,106.3 R_BOOT.1 | 16.76,106.3 10.1,106.3 3.37,99.57 3.37,99.06 R5.2 | v53.85,106.36 59.94,106.36 R_CHANGE.1 | v45.78,106.36 45.15,106.36 R_RESET.1 45.02,106.3 45.02,102.36 48.32,99.06 48.58,99.06 IC2.2 48.26,98.93 47.82,98.49 47.82,54.55 | R10.2 6.35,84.33 3.94,86.74 3.94,89.85 4.57,90.49 4.76,90.49 J4.P4 4.95,90.49 5.4,90.49 v6.54,91.63 | v13.97,99.82 13.65,99.5 13.65,99.06 R7.2 | v15.18,99.82 15.49,99.82 15.94,99.38 C9.1 | R6.2 16.7,79.06 16.7,87 16.76,87.06 16.76,98.55 16.07,99.25 C9.1 | 16.76,106.3 16.76,100.14 16.07,99.44 C9.1 | J3.2 165.29,18.86 152.84,18.86 132.08,39.62 131.13,39.62 C1_BAT2.2 130.94,39.69 126.81,39.69 126.05,40.45 C3.+ 125.86,40.51 v120.52,45.85 | 32.89,52.39 32.13,53.15 32.13,53.34 U2.3 | 32.89,52.39 32.89,49.53 31.11,47.75 R8.2 30.99,47.62 23.75,40.39 19.05,40.39 R1.2 18.86,40.39 18.73,40.51 v18.16,40.51 | v12.38,40.51 9.02,43.88 9.02,44.2 U1.2 | 72.64,30.99 73.09,30.99 Q2.3 | 72.64,30.99 70.67,30.99 70.23,30.54 70.23,29.53 72.64,27.11 72.64,26.04 R9.2 | 72.64,30.99 72.64,33.97 R_CL1.1 72.71,34.1 72.71,38.99 78.93,45.21 R12.2 79.06,45.4 80.71,45.4 | 80.71,45.4 81.98,45.4 R13.2 82.11,45.47 84.58,47.94 102.87,47.94 3V3.TP 103.06,48.01 103.44,48.39 106.05,48.39 IC1.5 106.17,48.32 v106.74,47.75 | 39.88,55.12 39.88,55.88 U2.8 | 39.88,55.12 39.88,54.67 U2.7 40.01,54.55 47.82,54.55 | 47.82,54.55 74.3,54.55 74.87,53.98 D12.2 75.06,53.91 77.53,53.91 80.71,50.74 80.71,50.35 U3.2 80.71,50.16 80.71,45.4 | 39.88,55.12 v39.18,55.12 | v33.02,52.45 32.89,52.39
  Bottom 0.3: v53.85,106.36 v45.78,106.36 45.66,106.3 21.72,106.3 15.3,99.89 v15.18,99.82 v13.97,99.82 14.03,99.69 6.54,92.2 v6.54,91.63 | v18.16,40.51 v12.38,40.51 | v33.02,52.45 36.51,52.45 v39.18,55.12 | v120.52,45.85 108.65,45.85 v106.74,47.75
12C_PW  (via drill 0.3)
  Top 0.3: SENSOR2.6 147.89,10.86 147.89,10.54 148.97,9.46 148.97,8.7 C1_SENS.1 149.03,8.51 149.73,7.81 149.73,6.86 149.54,6.67 145.48,6.67 145.22,6.92 145.22,7.87 145.92,8.57 C2_SENS.1 146.05,8.7 146.05,10.67 146.24,10.86 SENSOR2.8 146.18,10.99 146.18,12.45 145.73,12.89 145.73,14.41 145.92,14.61 147.07,14.61 | R1_PINH.2 147.07,17.65 148.97,17.65 R2_PINH.2 | 147.07,14.61 147.07,15.11 146.3,15.88 146.3,16.83 147,17.53 R1_PINH.2 | 147.07,14.61 147.07,13.84 SENSOR2.2 | v22.48,62.87 21.72,62.1 21.72,61.78 U1.17 | v131.83,39.12 131.83,32.96 147,17.78 R1_PINH.2
  Bottom 0.3: v22.48,62.87 108.08,62.87 v131.83,39.12
32KHZ  (via drill 0.3)
  Top 0.127: U3.1 79.44,50.29 79.06,49.91 79.06,46.67 R12.1 78.99,46.61 78.42,46.04 v78.3,46.04 | v28.64,46.04 19.43,46.04 17.91,44.51 U1.9
  Bottom 0.127: v78.3,46.04 v28.64,46.04
DN
  Top 0.127: 163.1,53.75 163.07,53.78 163.07,54.17 163.45,54.55 164.47,54.55 J2.A7 | 163.1,53.75 163.32,53.53 164.47,53.53 J2.B7 | D1.1 152.78,48.01 152.78,48.58 157.92,53.72 163.07,53.72 163.1,53.75
DP  (via drill 0.3)
  Top 0.127: J2.B6 164.53,54.99 165.1,54.99 165.29,54.8 165.29,54.29 165.1,54.1 164.53,54.1 J2.A6 164.47,54.04 164.4,53.98 v163.51,53.98 | v154.24,46.1 152.78,46.1 D1.3
  Bottom 0.127: v154.24,46.1 155.64,46.1 v163.51,53.98
EPD_3V3  (via drill 0.3)
  Top 0.3: Q2.2 71.06,30.1 74.49,30.1 74.99,30.61 C7.1 75.12,30.54 77.34,30.54 77.85,30.04 EPD_3V3.TP | J1.16 81.28,14.48 81.72,14.48 J1.15 81.72,14.35 v81.72,13.65 | v83.82,25.4 84.96,25.4 EPD_C5.2 | v79.38,29.84 78.17,29.84 78.04,29.97 EPD_3V3.TP | L1.2 77.98,33.66 77.98,31.24 77.41,30.67 EPD_3V3.TP
  Bottom 0.3: v79.38,29.84 v83.82,25.4 83.76,25.27 81.72,23.24 v81.72,13.65
EPD_3V3_C
  Top 0.3: 71.06,33.72 71.06,32 Q2.1 | 71.06,33.72 71.31,33.97 R_CL1.2 | EPD_3V3_C.TP 20.57,65.41 20.45,65.28 20.45,61.78 U1.18 20.51,61.66 20.51,61.34 21.72,60.13 34.16,60.13 38.04,56.26 38.04,55.44 39.37,54.1 43.75,54.1 64.07,33.78 70.93,33.78 71.06,33.72
EPD_BUSY  (via drill 0.3)
  Top 0.127: v83.19,12.64 83.82,12.64 84.71,13.53 84.71,14.41 J1.9 | v11.56,60.26 10.29,61.53 10.29,61.72 U1.26 10.22,61.78 10.22,62.04 9.59,62.67 9.59,73.41 EPD_BUSY.TP
  Bottom 0.127: v83.19,12.64 82.93,12.64 81.98,11.68 62.55,11.68 30.16,44.07 12.13,44.07 9.84,46.35 9.84,48.32 11.56,50.04 v11.56,60.26
EPD_CS  (via drill 0.3)
  Top 0.127: v20.89,43.12 20.45,43.56 20.45,44.2 U1.11 | v25.02,38.99 25.97,38.04 EPD_CS.TP 26.04,37.97 59.37,37.97 71.31,26.04 R9.1 71.37,25.97 v71.37,23.88 | v78.99,13.65 80.2,12.45 82.36,12.45 83.25,13.34 83.25,14.41 J1.12 | v72.77,19.88 72.77,22.99 D10.2
  Bottom 0.127: v25.02,38.99 v20.89,43.12 | v78.99,13.65 v72.77,19.88 71.37,21.27 v71.37,23.88
EPD_DC  (via drill 0.3)
  Top 0.127: v83.76,13.21 83.76,14.41 J1.11 | v41.27,33.97 13.02,33.97 EPD_DC.TP 12.95,34.04 12.83,34.16 12.83,44.2 U1.5
  Bottom 0.127: v83.76,13.21 84.39,13.21 84.64,13.46 84.64,13.84 84.39,14.1 83.63,14.1 81.72,12.19 63.06,12.19 v41.27,33.97
EPD_RST  (via drill 0.3)
  Top 0.127: v84.2,13.65 84.2,14.41 J1.10 | v16.51,60.64 16.51,61.66 16.57,61.72 U1.21 16.64,61.78 16.95,62.1 16.95,67.94 EPD_RST.TP
  Bottom 0.127: v84.2,13.65 83.57,13.65 81.85,11.94 62.67,11.94 30.29,44.32 16.7,44.32 15.81,45.21 15.81,51.69 16.51,52.39 v16.51,60.64
FLASH_CS
  Top 0.127: U2.1 32.13,55.88 32.45,55.88 33.47,54.86 33.47,48.2 33.02,47.75 D9.2 32.96,47.69 31.62,46.35 31.05,46.35 R8.1 30.99,46.29 24.45,39.75 18.29,39.75 17.72,40.32 17.72,40.7 17.97,40.96 19.43,40.96 21.65,43.18 21.65,44.2 U1.12
GDR  (via drill 0.3)
  Top 0.3: v85.6,11.3 88.2,13.91 88.2,14.41 J1.2 | v62.29,11.3 61.66,11.94 R3.1 61.72,12.13 62.29,12.7 62.29,15.94 Q4.1
  Bottom 0.3: v62.29,11.3 v85.6,11.3
GND  (via drill 0.3)
  Top 0.3: 31.3,53.09 32.07,52.32 32.07,52.13 U2.4 | 31.3,53.09 31.3,53.66 31.75,54.1 32.64,54.1 32.89,54.36 32.89,54.93 32.45,55.37 31.56,55.37 31.3,55.63 31.3,56.2 31.56,56.45 33.53,56.45 35.94,54.04 U2.9 36.01,53.85 36.01,49.4 33.02,46.42 33.02,46.29 D9.1 | U1.29_1 12.19,50.29 12.19,51.44 U1.29_2 12.19,51.63 12.19,52.7 U1.29_3 | U1.29_4 13.4,50.29 12.32,50.29 U1.29_1 | U1.29_5 13.46,51.44 13.46,50.42 U1.29_4 | U1.29_4 13.59,50.29 14.67,50.29 U1.29_7 14.73,50.42 14.73,51.44 U1.29_8 | U1.29_3 12.32,52.77 13.4,52.77 U1.29_6 13.59,52.77 14.67,52.77 U1.29_9 14.86,52.77 15.11,53.02 31.18,53.02 31.3,53.09 | v7.75,46.86 U1.1 | v11.11,50.23 12.06,50.23 U1.29_1 | U1.28 7.75,61.72 7.75,57.34 12.19,52.9 U1.29_3 | 12.19,77.28 12.95,77.28 D7.1 | 12.19,77.28 11.05,77.28 | 11.05,77.28 10.03,77.28 D11.1 | 12.19,77.28 12.19,82.11 15.37,85.28 J4.G1 15.43,85.41 15.43,86.36 16.32,87.25 16.32,90.17 15.43,91.06 J4.G2 15.37,91.25 15.37,92.08 14.48,92.96 14.48,100.71 | 14.48,100.71 10.03,100.71 D8.1 9.91,100.78 7.05,100.78 D6.1 6.86,100.71 5.14,100.71 4,99.57 4,97.35 2.29,95.63 J4.G4 2.16,95.5 2.16,95.12 4.57,92.71 4.76,92.71 J4.P6 4.45,92.65 1.21,89.41 1.21,82.42 J4.G3 | 14.48,100.71 15.94,100.71 C9.2 16,100.84 v16,101.98 | U3.13 83.25,59.63 82.68,60.2 82.68,61.98 C1.2 82.74,62.1 83.06,62.42 83.06,65.98 C10_SUPERCAP.2 83,66.1 83,66.99 | 82.68,84.52 83.44,84.52 83.95,84.01 GND_2.TP | 82.68,84.52 78.42,84.52 GND_1.TP 78.36,84.64 78.36,95.95 68.07,106.24 C10.2 67.94,106.36 67.63,106.36 65.79,108.2 CHANGE_BUTTON.2 65.66,108.27 62.29,108.27 CHANGE_BUTTON.1 62.17,108.14 62.17,107.31 60.45,105.6 53.91,105.6 53.78,105.54
  Top 0.3: 83,66.99 83,78.17 82.68,78.49 82.68,84.52 | IC2.3 48.64,98.11 50.29,98.11 50.86,98.68 52.64,98.68 52.96,98.36 C_DELAY.2 53.09,98.42 53.78,99.12 53.78,105.54 | 53.78,105.54 53.09,106.24 C5.2 52.96,106.36 52.64,106.36 50.8,108.2 RESET_BUTTON.2 50.61,108.27 47.31,108.27 RESET_BUTTON.1 47.12,108.27 44.39,108.27 42.48,106.36 28.13,106.36 C6.2 27.94,106.36 27.62,106.36 25.78,108.2 BOOT_BUTTON.2 25.65,108.27 22.29,108.27 BOOT_BUTTON.1 22.16,108.14 v21.34,107.31 | 11.05,77.28 v11.05,74.8 | 147.07,7.37 148.97,7.37 C1_SENS.2 | 147.07,7.37 146.05,7.37 C2_SENS.2 | 147.51,11.68 147.13,11.3 147.13,10.92 SENSOR2.7 147.07,10.73 147.07,7.37 | 147.51,11.68 148.21,11.68 148.65,11.24 148.65,10.92 SENSOR2.5 148.78,11.3 155.26,17.78 165.29,17.78 J3.1 165.42,17.91 165.86,17.91 166.31,18.35 166.31,30.61 157.16,39.75 157.1,39.88 | SENSOR2.1 146.3,13.78 146.3,12.95 147.45,11.81 147.51,11.68 | R2-USB1.1 158.31,53.02 158.31,49.66 155.7,47.05 155.26,47.05 D1.5 155.77,46.93 156.15,46.55 156.15,44.9 155.19,43.94 155.19,40.07 155.38,39.88 157.1,39.88 | J2.B12 164.53,51.24 164.53,50.99 J2.A1 164.47,50.8 164.47,49.78 165.04,49.21 J2.MP3 | 166.31,49.21 165.16,49.21 J2.MP3 | 166.31,49.21 168.97,49.21 J2.MP1 | 149.73,48.9 149.73,50.74 C5_USB.2 149.8,50.86 154.88,55.94 158.24,55.94 R2-USB2.2 158.37,56.01 159.7,57.34 164.47,57.34 J2.B1 164.53,57.47 164.53,57.59 J2.A12 164.53,57.78 165.04,58.29 | 149.73,48.9 149.73,47.82 C4_USB.2 | 165.04,58.29 165.04,59.37 J2.MP4 165.16,59.44 168.97,59.44 J2.MP2 | 166.31,49.21 166.31,57.47 165.54,58.23 165.16,58.23 165.04,58.29 | 157.1,39.88 164.97,47.75 164.97,49.09 J2.MP3
  Top 0.3: R3.2 60.33,11.94 60.33,10.1 60.26,10.03 SJ1.1 60.33,9.91 60.33,9.65 61.09,8.89 62.48,8.89 64.26,10.67 64.52,10.67 R4.1 64.64,10.79 69.34,15.49 69.34,17.91 70.04,18.61 EPD_C12.1 70.17,18.67 71.25,18.67 | EPD_C10.1 75.06,26.67 76.96,26.67 EPD_C9.1 77.03,26.8 v77.6,27.37 | C7.2 75.06,29.34 75.06,26.8 EPD_C10.1 | 71.25,18.67 71.94,18.67 EPD_C11.1 | 71.25,18.67 71.25,22.99 D10.1 71.31,23.05 74.87,26.61 EPD_C10.1 | J1.MP2 76.26,11.94 76.64,11.94 77.79,10.79 88.58,10.79 89.72,11.94 J1.MP1 89.79,12.06 89.79,25.84 | 85.03,15.18 81.03,15.18 80.77,14.92 80.77,14.48 J1.17 | 85.03,15.18 85.22,14.99 85.22,14.48 J1.8 | 84.26,26.67 84.96,26.67 EPD_C5.1 85.09,26.67 85.79,26.67 | 84.26,26.67 83.06,26.67 EPD_C6.1 82.87,26.67 81.09,26.67 EPD_C7.1 80.96,26.67 79.06,26.67 EPD_C8.1 78.87,26.61 v78.17,26.61 | 85.79,26.67 87,26.67 EPD_C2.1 87.12,26.67 88.96,26.67 EPD_C1.1 89.09,26.54 89.79,25.84 | 84.26,26.67 84.26,31.94 D3.1 | 85.79,26.67 85.79,24.89 85.09,24.19 85.09,15.3 85.03,15.18 | U4.9 131.95,53.98 131.95,53.78 131.44,53.28 131.06,53.28 U4.4 130.87,53.28 129.54,53.28 | U4.1 131.06,54.74 131.44,54.74 131.89,54.29 131.89,54.1 U4.9 | U4.6 132.97,53.78 132.08,53.78 U4.9 | 129.54,53.28 126.11,53.28 C2_BAT.2 125.98,53.34 123.7,51.05 123.32,51.05 MCP73831.2 123.19,51.12 122.81,51.12 121.16,52.77 113.16,52.77 112.46,52.07 C1_BAT.2 112.33,51.94 112.33,51.63 107.92,47.21 | C1_BAT2.1 130.94,38.29 126.81,38.29 126.05,37.53 C3.- 126.11,37.78 120.02,43.88 120.02,47.18 R2_BAT.2 119.95,47.31 115,47.31 110.11,42.42 C1_BAT1.2 109.98,42.29 108.71,41.02 107.7,41.02 R1_PWRUSB.1
  Top 0.3: 106.78,46.07 106.49,46.35 105.6,46.35 105.41,46.16 105.41,44.83 107.31,42.93 107.31,41.47 107.63,41.15 R1_PWRUSB.1 | 106.78,46.07 107,45.85 107,45.66 IC1.2 | 106.78,46.07 107.92,47.21 | 89.79,25.84 89.92,25.91 92.46,25.91 107.5,40.96 R1_PWRUSB.1 | 149.73,48.9 129.73,48.9 129.54,49.09 129.54,53.28 | 83,66.99 80.07,66.99 73.09,60.01 73.09,56.71 75.12,54.67 100.97,54.67 107.31,48.32 107.31,47.82 107.92,47.21
  Bottom 0.3: v7.75,46.86 v11.11,50.23 11.05,50.35 v11.05,74.8 | v21.34,107.31 v16,101.98 | v77.6,27.37 77.6,27.18 v78.17,26.61
  pour Top: 73.96,10.06 73.98,10.08 92.22,10.08 92.24,10.06 92.26,10.04 92.28,10.02 92.28,0.08 170.12,0.08 170.12,67.12 92.18,67.12 92.16,67.14 92.14,67.16 92.12,67.18 92.12,111.12 68.08,111.12 68.08,110.58 68.06,110.56 68.04,110.54 68.02,110.52 19.98,110.52 19.96,110.54 19.94,110.56 19.92,110.58 19.92,111.12 0.08,111.12 0.08,0.08 73.92,0.08 73.92,10.02 73.94,10.04
  pour Bottom: 73.96,10.06 73.98,10.08 92.22,10.08 92.24,10.06 92.26,10.04 92.28,10.02 92.28,0.08 170.12,0.08 170.12,67.12 92.18,67.12 92.16,67.14 92.14,67.16 92.12,67.18 92.12,111.12 68.08,111.12 68.08,110.58 68.06,110.56 68.04,110.54 68.02,110.52 19.98,110.52 19.96,110.54 19.94,110.56 19.92,110.58 19.92,111.12 0.08,111.12 0.08,0.08 73.92,0.08 73.92,10.02 73.94,10.04
GND1
  Top 0.127: R2-USB2.1 159.7,56.01 164.47,56.01 J2.B5
GPIO8
  Top 0.127: R1.1 19.05,41.66 19.05,44.13 19.11,44.2 U1.10
INT_RTC  (via drill 0.3)
  Top 0.127: 82.04,47.18 82.04,50.29 U3.3 | 82.04,47.18 82.04,46.67 R13.1 | INT_RTC.TP 16.83,36.45 16.64,36.64 16.64,44.2 U1.8 16.64,44.51 19.3,47.18 v19.68,47.18 | v81.22,47.18 82.04,47.18
  Bottom 0.127: v19.68,47.18 v81.22,47.18
IO/BOOT
  Top 0.127: C6.1 27.94,107.7 27.81,107.7 25.78,109.73 BOOT_BUTTON.3 25.72,109.79 22.29,109.79 BOOT_BUTTON.4 22.23,109.73 20.19,107.7 20,107.7 R_BOOT.2 20.26,107.7 24.19,103.76 24.19,61.78 U1.15
IO/CHANGE  (via drill 0.3)
  Top 0.127: C10.1 67.94,107.7 67.82,107.7 65.79,109.73 CHANGE_BUTTON.3 65.72,109.79 62.29,109.79 CHANGE_BUTTON.4 62.23,109.73 60.2,107.7 60.01,107.7 R_CHANGE.2 59.94,107.63 59.37,107.06 v59.18,107.06 | v16.51,64.39 14.1,61.98 14.1,61.78 U1.23
  Bottom 0.127: v59.18,107.06 v16.51,64.39
MISO
  Top 0.127: 5.97,99.06 6.86,99.06 6.99,99.19 D6.2 | 5.97,99.06 4.7,99.06 R5.1 | 5.97,99.06 5.97,94.49 5.33,93.85 5.02,93.85 J4.P7 5.4,93.85 5.4,93.47 10.79,88.08 10.79,78.3 10.48,77.98 9.46,77.98 8.32,76.83 8.32,62.67 8.95,62.04 8.95,61.78 U1.27 9.02,61.72 9.02,61.53 14.54,56.01 28.07,56.01 MISO.TP 28.13,55.94 29.4,54.67 32.07,54.67 U2.2
MOSI  (via drill 0.3)
  Top 0.127: v10.35,84.77 5.78,89.34 5.02,89.34 J4.P3 | v13.14,81.98 13.14,78.99 D7.2 13.02,78.8 13.21,78.99 15.3,78.99 R6.1 15.3,78.93 15.3,71.44 18.22,68.52 v18.22,62.87 | v82.23,13.34 82.23,14.41 J1.14 | v47.05,44.58 47.05,48.96 MOSI.TP 46.99,49.02 43.94,52.07 39.94,52.07 U2.5 | v16.26,45.4 15.37,44.51 U1.7
  Bottom 0.127: v13.14,81.98 v10.35,84.77 | v82.23,13.34 82.04,13.34 81.15,12.45 79.18,12.45 v47.05,44.58 24.45,44.58 23.62,45.4 18.22,45.4 | 18.22,45.4 v16.26,45.4 | 18.22,45.4 v18.22,62.87
N$1
  Top 0.127: R2-USB1.2 159.7,53.02 164.47,53.02 J2.A5
N$2
  Top 0.127: J1.19 79.76,14.48 79.76,24.13 80.96,25.34 EPD_C7.2
N$3
  Top 0.127: R1_BAT.1 117.67,50.04 119.51,50.04 120.02,50.55 122.56,50.55 123,50.1 123.25,50.1 MCP73831.1
N$4
  Top 0.127: 107.41,44.99 107.95,45.53 IC1.3 | 107.41,44.99 107.38,44.96 106.62,44.96 106.11,45.47 106.11,45.59 IC1.1 | Q1.2 131.19,47.5 130.43,47.5 129.79,46.86 121.6,46.86 120.52,47.94 114.3,47.94 110.05,43.69 C1_BAT1.1 109.98,43.62 109.41,43.05 108.08,43.05 D2.1 108.08,43.12 107.44,43.75 107.44,44.96 107.41,44.99
N$5
  Top 0.127: CHG_LED.C 116.27,51.94 116.27,50.1 116.33,50.04 R1_BAT.2
N$6
  Top 0.127: J1.18 80.26,14.48 80.26,22.61 83,25.34 EPD_C6.2
N$7
  Top 0.127: R2_BAT.1 120.02,48.7 120.02,49.4 120.65,50.04 MCP73831.5
N$8
  Top 0.127: C4.1 89.98,38.29 87.69,36.01 D4.1 87.76,35.94 D3.2
N$10
  Top 0.127: J1.20 79.25,14.48 79.25,25.15 79.06,25.34 EPD_C8.2
N$11
  Top 0.127: J1.22 78.23,14.48 78.23,22.16 75.06,25.34 EPD_C10.2
N$13
  Top 0.127: J1.24 77.22,14.48 75.95,14.48 72.52,17.91 70.61,17.91 70.17,17.46 EPD_C12.2
N$17
  Top 0.127: C_DELAY.1 52.96,99.69 51.69,99.69 51.44,99.95 IC2.5
N$22
  Top 0.127: J1.5 86.81,14.48 86.81,25.15 87,25.34 EPD_C2.2
N$23
  Top 0.127: J1.4 87.31,14.48 87.31,23.69 88.96,25.34 EPD_C1.2
N$26
  Top 0.127: R_CAPACITOR.1 74.99,58.93 74.99,56.07 D12.1
PREVGH
  Top 0.127: J1.21 78.74,14.48 78.74,23.62 77.03,25.34 EPD_C9.2 77.03,25.4 77.66,26.04 77.66,26.73 80.9,29.97 80.9,33.91 84.2,37.21 84.2,39.94 D5.1
PREVGL  (via drill 0.3)
  Top 0.3: EPD_C11.2 72.01,17.34 75.63,13.72 77.47,13.72 77.72,13.97 77.72,14.41 J1.23 77.79,14.61 v77.79,15.49 | v81.34,33.08 84.2,35.94 D4.2
  Bottom 0.3: v81.34,33.08 81.34,32.58 78.68,29.91 78.68,16.38 v77.79,15.49
RESE
  Top 0.127: 62.99,16.64 63.63,16 Q4.2 | 62.99,16.64 62.93,16.7 62.04,16.7 59.44,14.1 59.44,9.14 60.07,8.51 63.5,8.51 67.56,12.57 76.52,12.57 76.9,12.19 85.85,12.19 87.69,14.03 87.69,14.41 J1.3 | 62.99,16.64 67.94,21.59 R2.1
RESE'
  Top 0.127: SJ1.2 61.78,10.03 63.69,11.94 64.52,11.94 R4.2 64.58,12 67.94,15.37 67.94,20.32 R2.2
RESET  (via drill 0.3)
  Top 0.127: RESET_BUTTON.4 47.31,109.79 50.74,109.79 RESET_BUTTON.3 50.8,109.73 52.83,107.7 52.96,107.7 C5.1 53.02,107.63 v53.66,107 | IC2.1 48.58,100.01 v48.58,100.65 48.58,104.2 45.15,107.63 45.02,107.63 R_RESET.2 | v10.29,46.55 U1.3
  Bottom 0.127: v10.29,46.55 16.07,52.32 16.07,68.14 v48.58,100.65 48.77,100.65 54.29,106.17 54.29,106.55 53.85,107 v53.66,107
RTC_RST  (via drill 0.3)
  Top 0.127: v23.88,60.64 22.99,61.53 22.99,61.72 U1.16 | v82.17,51.69 83.25,50.61 83.25,50.35 U3.4
  Bottom 0.127: v23.88,60.64 73.22,60.64 v82.17,51.69
RX
  Top 0.127: U1.24 12.83,61.78 12.83,66.86 12.95,66.99 RX.TP
SCK  (via drill 0.3)
  Top 0.127: R7.1 12.32,99.06 10.16,99.06 10.03,99.19 D8.2 10.1,99.06 v10.1,96.52 | v5.91,92.33 5.21,91.63 5.02,91.63 J4.P5 | v11.94,101.22 11.94,104.97 SCK.TP | v80.39,12.89 82.42,12.89 82.74,13.21 82.74,14.41 J1.13 | 39.53,51.53 39.18,51.88 39.18,52.64 39.88,53.34 U2.6 | 39.53,51.53 v45.97,45.09 | 39.53,51.53 33.53,45.53 30.92,45.53 20.64,35.24 16.38,35.24 14.1,37.53 14.1,44.2 U1.6 14.03,44.26 14.03,44.51 12,46.55 v12,48.9
  Bottom 0.127: v11.94,101.22 11.94,98.36 v10.1,96.52 v5.91,92.33 5.97,92.33 5.97,80.52 12,74.49 v12,48.9 | v80.39,12.89 79.12,12.89 47.5,44.51 47.5,44.77 47.18,45.09 v45.97,45.09
SCL  (via drill 0.3)
  Top 0.127: v19.81,59.63 17.91,61.53 17.91,61.72 U1.20 | v73.6,59.63 79.44,59.63 U3.16 79.5,59.56 79.5,59.24 82.68,56.07 v133.03,56.07 | v134.18,53.91 133.86,54.23 133.03,54.23 U4.7 | 149.64,18.13 149.67,18.1 149.67,17.02 149.03,16.38 R2_PINH.1 148.97,16.32 148.72,16.07 148.72,13.84 SENSOR2.4 | 149.64,18.13 v134.18,33.59 | v154.37,20.77 165.29,20.77 J3.4 | v151.76,18.16 149.67,18.16 149.64,18.13
  Bottom 0.127: v73.6,59.63 v19.81,59.63 | v134.18,33.59 v134.18,53.91 134.18,54.93 v133.03,56.07 | v151.76,18.16 v154.37,20.77
SDA  (via drill 0.3)
  Top 0.127: v20.07,60.64 19.18,61.53 19.18,61.72 U1.19 | v80.07,60.77 80.07,60.26 80.71,59.63 U3.15 | v133.73,54.74 133.03,54.74 U4.8 | v147.76,17.02 147.07,16.32 R1_PINH.1 147.07,16.26 147.83,15.49 147.83,13.84 SENSOR2.3 | v152.72,19.75 165.29,19.75 J3.3
  Bottom 0.127: v20.07,60.64 23.24,60.64 23.69,61.09 79.76,61.09 v80.07,60.77 87.88,60.77 109.98,38.67 133.73,38.67 | 133.73,38.67 133.73,31.05 v147.76,17.02 147.76,17.08 150.43,19.75 v152.72,19.75 | 133.73,38.67 v133.73,54.74
SRC  (via drill 0.3)
  Top 0.127: C4.2 89.98,39.69 88.01,39.69 87.76,39.94 D5.2 87.69,40.01 85.53,40.01 84.9,40.64 80.39,40.64 78.04,38.29 L1.1 77.98,38.23 v77.66,37.91 | v70.61,25.65 63.06,18.1 Q4.3
  Bottom 0.127: v70.61,25.65 70.61,30.86 v77.66,37.91
SS_SD
  Top 0.127: R10.1 7.68,78.99 9.78,78.99 9.97,78.8 D11.2 | J4.P2 5.46,88.27 5.46,88.14 7.62,85.98 7.62,79.06 R10.1 | U1.4 11.49,44.26 11.49,49.21 7.05,53.66 7.05,78.3 7.68,78.93 R10.1
TX
  Top 0.127: U1.25 11.49,61.78 11.49,69.53 11.05,69.98 TX.TP
USB_D+  (via drill 0.3)
  Top 0.127: v127.51,40.2 131.57,40.2 131.76,40.01 152.59,40.01 152.72,40.13 152.72,41.97 155.19,44.45 155.19,46.04 D1.4 | v107.5,40.2 v109.09,40.2 | v25.53,45.53 U1.14
  Bottom 0.127: v109.09,40.2 v127.51,40.2 | v107.5,40.2 52.45,40.2 47.12,45.53 v25.53,45.53
USB_D-  (via drill 0.3)
  Top 0.127: v153.73,48.01 155.19,48.01 D1.6 | v24.07,45.59 22.99,44.51 U1.13
  Bottom 0.127: v153.73,48.01 141.73,48.01 126.43,63.31 22.1,63.31 19.24,60.45 19.24,46.99 20.57,45.66 24,45.66 v24.07,45.59
VBAT
  Top 0.3: MCP73831.3 123.32,51.94 125.98,54.61 C2_BAT.1 126.11,54.55 130.3,54.55 | U4.3 131.06,53.78 131.06,54.23 U4.2 130.87,54.29 130.56,54.29 130.3,54.55 | 133.54,55.24 130.62,55.24 130.3,54.93 130.3,54.55 | 133.54,55.24 133.99,55.24 134.68,54.55 134.68,53.66 130.75,49.72 130.3,49.72 Q1.3 | 133.54,55.24 133.54,56.33 133.29,56.58 102.3,56.58 84.01,74.87 VBAT.TP
VBUS  (via drill 0.3)
  Top 0.3: R1_PWRUSB.2 106.3,41.02 105.98,41.34 105.98,42.99 D2.2 105.86,43.12 105.86,43.62 v105.66,43.81 | MCP73831.4 120.65,52.01 117.79,52.01 CHG_LED.A 117.6,52.01 v116.97,51.37 | v115.44,51.94 113.67,51.94 C1_BAT.1 | C5_USB.1 151,50.8 151,47.94 C4_USB.1 151.13,47.75 151.64,47.75 152.34,47.05 152.72,47.05 D1.2 152.27,46.93 151.76,46.42 151.76,42.04 PFMF.050.1.2 151.64,42.48 146.37,42.48 VBUS.TP 146.18,42.48 140.34,48.32 130.68,48.32 129.92,47.56 129.35,47.56 Q1.1 129.22,47.62 v122.56,47.62
  Bottom 0.3: v105.66,43.81 105.66,47.43 110.11,51.88 115.32,51.88 v115.44,51.94 116.39,51.94 v116.97,51.37 117.09,51.31 118.87,51.31 v122.56,47.62
VRTC
  Top 0.127: 80.9,61.98 81.34,61.98 C1.1 81.34,61.91 81.98,61.28 81.98,59.63 U3.14 | 80.9,61.98 80.26,61.98 78.55,60.26 74.99,60.26 R_CAPACITOR.2 | 80.9,61.98 80.9,65.98 C10_SUPERCAP.1
VUSB
  Top 0.3: J2.A9 164.53,56.83 164.53,56.58 J2.B4 164.66,56.52 165.16,56.52 165.67,56.01 165.67,52.58 165.16,52.07 164.66,52.07 J2.B9 164.53,52.01 164.53,51.75 J2.A4 164.4,51.75 163.83,51.75 156.27,44.2 156.27,42.04 PFMF.050.1.1